# Altium PCB 控制器终.PcbDoc (part 2 of 2)
Units mil, origin at the board's own origin, x right, y up, seen from the top; angles counter-clockwise.
Board outline 4045 x 3522 mil, 2 copper layers (Top Layer, Bottom Layer); 118 components, 129 nets, 483 pads, 116 vias.
Unrouted connection lines stored in the file: 1.
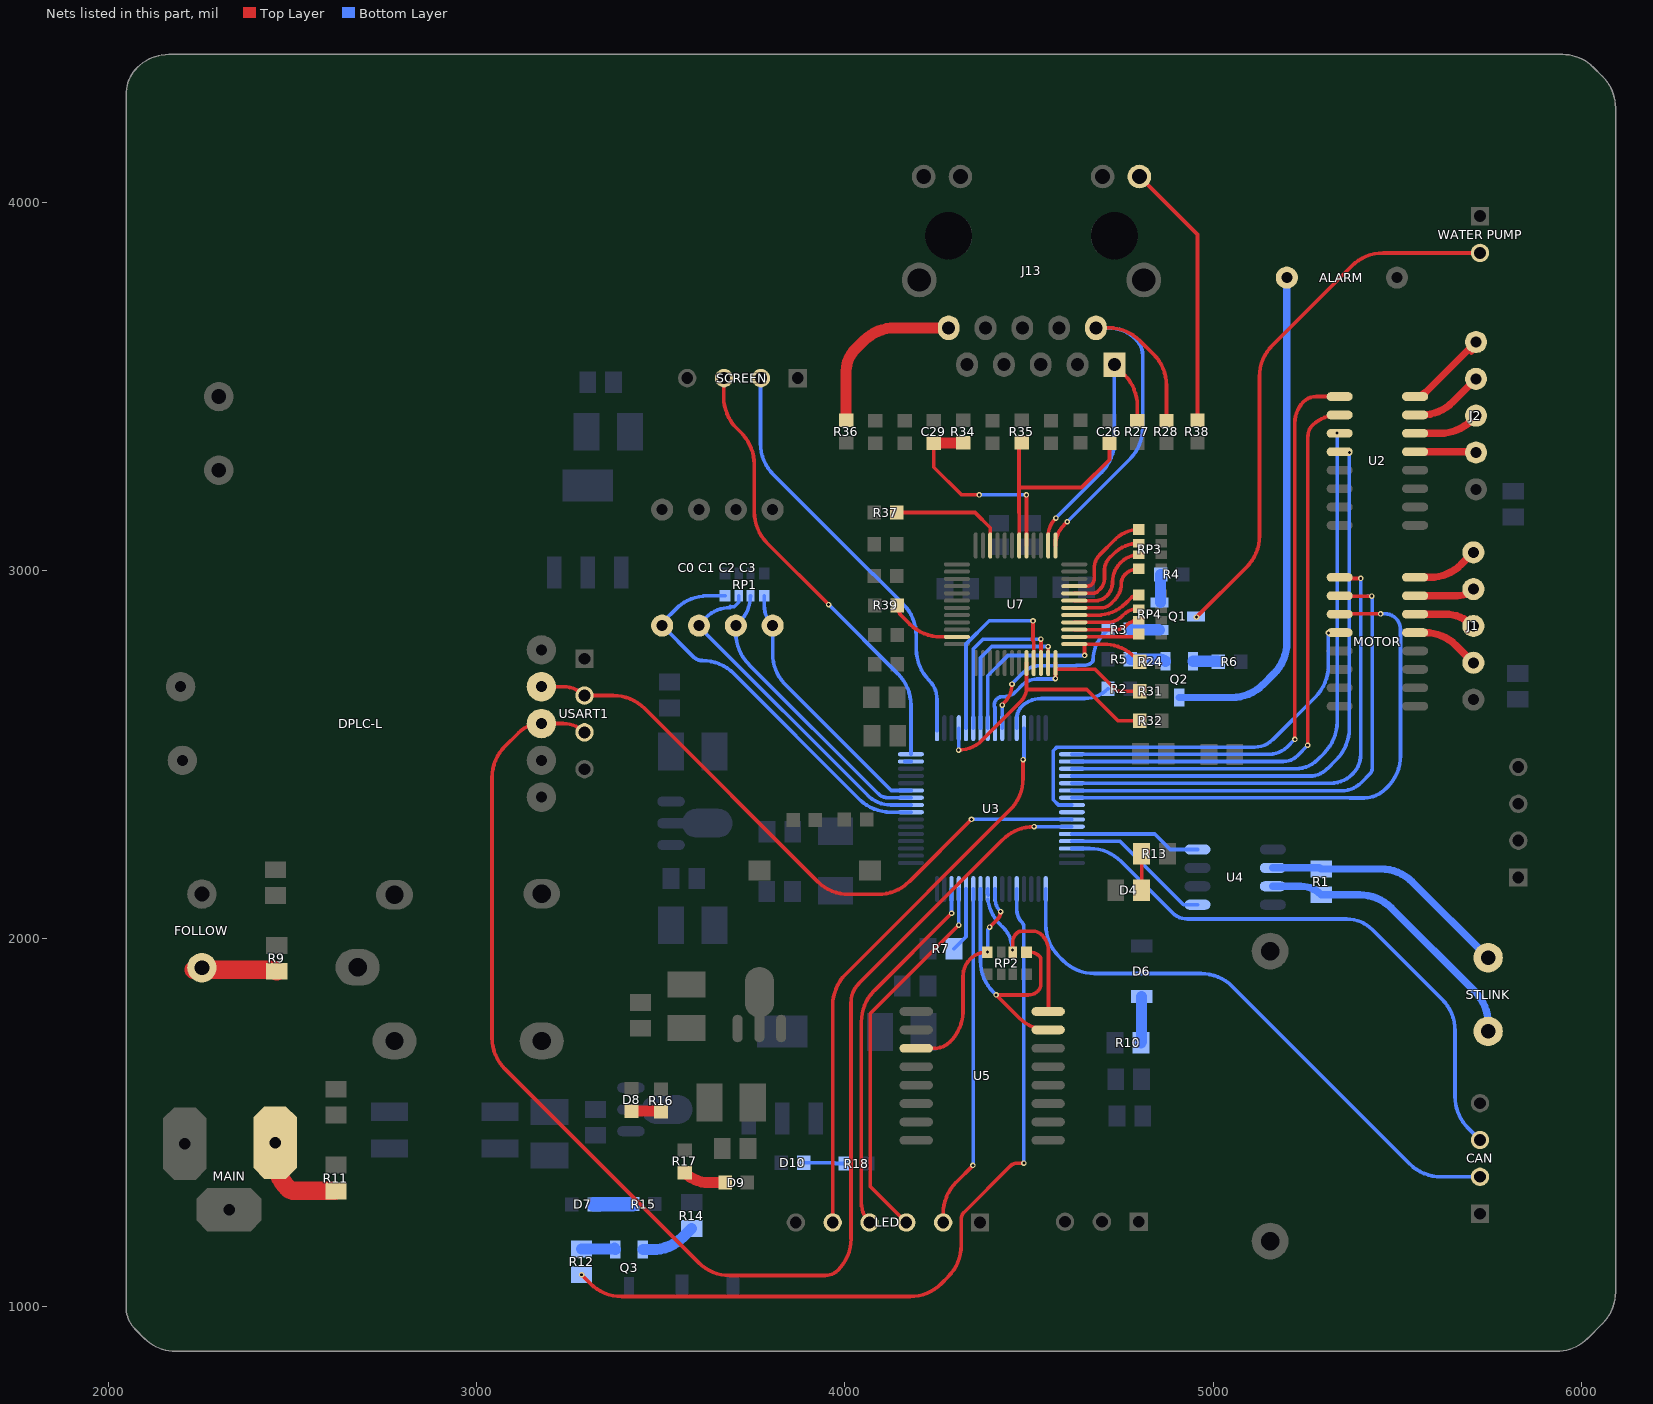
[diagram p2: the nets of this part, all layers, seen from the top]

## Via types
v1: diameter 15, hole 8, Top Layer to Bottom Layer, 112 vias
v2: diameter 196.85, hole 157.48, Top Layer to Bottom Layer, 3 vias
v3: diameter 196.85/196.85 (per signal layer), hole 157.48, Top Layer to Bottom Layer, 1 vias

## Nets (pads, with @x,y where several pads share a name; then routed paths per layer and width w, separated by ;. In a path a pad name is that pad's centre, name@x,y a point inside that pad or via, vN(x,y) a via of type N, cw(c..) or ccw(c..) an arc to the next point about the centre after c; other vN are vias at no path point) (continued)
NetD4_K: D4.K R13.2@4805.96,2230.38 | length 115.7
  Top Layer w10: R13.2@4805.96,2214.08 R13.2@4805.96,2230.38 cw(c4805.77,2230.19) 4806.04,2230.19 D4.K@4806.04,2131
NetD5_K: 
NetD6_1: D6.1 R10.2 | length 126.1
  Bottom Layer w30: R10.2@4804.04,1716.98 ccw(c4799.31,1721.71) 4806,1721.71 D6.1@4806,1842.61
NetD7_K: D7.K R15.2 | length 105
  Bottom Layer w40: D7.K@3319,1278.21 3421.34,1278.21 ccw(c3421.34,1281.63) R15.2@3423.75,1279.21
NetD8_K: D8.K R16.2 | length 80.6
  Top Layer w30: D8.K@3420.91,1531.69 3496.76,1531.69 cw(c3496.76,1525.69) R16.2@3501,1529.93
NetD9_K: D9.K R17.2 | length 117
  Top Layer w30: R17.2@3565,1364.68 ccw(c3631.27,1430.95) 3631.27,1337.23 D9.K@3674.69,1337.23
NetD10_K: D10.K R18.2 | length 114.2
  Bottom Layer w10: D10.K@3888.31,1391 3972.64,1391 3974.64,1389 R18.2@4001.68,1389
NetD11_1: 
NetD11_2: 
NetJ1_1: J1.1 MOTOR.16 | length 181.4
  Top Layer w20: MOTOR.16@5548.56,2981 5588.99,2981 ccw(c5588.99,3101.71) 5674.35,3016.36 J1.1@5707,3049.01
NetJ1_2: J1.2 MOTOR.15 | length 163.3
  Top Layer w20: MOTOR.15@5548.56,2931 5663.52,2931 ccw(c5663.52,2992.49) J1.2@5707,2949.01
NetJ1_3: J1.3 MOTOR.14 | length 167
  Top Layer w20: MOTOR.14@5548.56,2881 5629.77,2881 cw(c5629.77,2771.78) J1.3@5707,2849.01
NetJ1_4: J1.4 MOTOR.13 | length 187.2
  Top Layer w20: MOTOR.13@5548.56,2831 5575.01,2831 cw(c5575.01,2710.29) 5660.37,2795.64 J1.4@5707,2749.01
NetJ2_1: J2.1 U2.16 | length 259.1
  Top Layer w10: 5701.26,3589.26 ccw(c5670.5,3620.02) J2.1@5714,3620.02
  Top Layer w20: U2.16@5548.56,3472 ccw(c5548.56,3514.06) 5578.3,3484.32 J2.1@5714,3620.02
NetJ2_2: J2.2 U2.15 | length 200.8
  Top Layer w20: U2.15@5548.56,3422 5565.98,3422 ccw(c5565.98,3542.71) 5651.34,3457.36 J2.2@5714,3520.02
NetJ2_3: J2.3 U2.14 | length 180.1
  Top Layer w20: U2.14@5548.56,3372 5615.98,3372 ccw(c5615.98,3492.71) 5701.34,3407.36 J2.3@5714,3420.02
NetJ2_4: J2.4 U2.13 | length 166
  Top Layer w20: U2.13@5548.56,3322 5709.22,3322 cw(c5709.22,3315.24) J2.4@5714,3320.02
NetJ4_2: "WATER PUMP.2" Q1.3 | length 1475.7
  Top Layer w10: v1(4955,2873) 5090.64,3008.64 ccw(c5005.29,3094) 5126,3094 5126,3526 cw(c5246.71,3526) 5161.36,3611.36 5376.64,3826.64 cw(c5462,3741.29) 5462,3862 5725,3862
NetJ6_1: R1.2 STLINK.1 U4.6 | length 680.1
  Bottom Layer w20: U4.6@5162.36,2192 5286.85,2192 cw(c5286.85,2181.89) R1.2@5294,2189.04 5455.96,2189.04 cw(c5455.96,2068.33) 5541.32,2153.68 STLINK.1@5747,1948
NetJ6_2: R1.1 STLINK.2 U4.7 | length 776.2
  Bottom Layer w20: U4.7@5162.36,2142 5238.38,2142 cw(c5238.38,2063.34) R1.1@5294,2118.96 5398.04,2118.96 cw(c5398.04,1998.25) 5483.4,2083.6 5711.64,1855.36 cw(c5626.29,1770) 5747,1770 STLINK.2@5747,1748
NetJ10_1: MAIN.1 R11.1 | length 265.4
  Top Layer w30: R11.1@2614,1314.78 R11.1@2618,1314.78
  Top Layer w50: MAIN.1@2452.72,1446 2452.72,1407.28 ccw(c2573.43,1407.28) 2488.08,1321.92 ccw(c2505.31,1339.16) 2505.31,1314.78 R11.1@2614,1314.78
NetJ13_10: J13.10 R36.2 | length 472.2
  Top Layer w30: R36.2@4003.63,3407.32 4003.63,3541.17 cw(c4086.83,3541.17) 4028,3600 4051.14,3623.14 cw(c4136.5,3537.79) 4136.5,3658.5 J13.10@4282,3658.5
NetJ13_11: J13.11 R38.2 | length 727.5
  Top Layer w10: J13.11@4800,4069.5 4957.63,3911.87 R38.2@4957.63,3407.32
NetP1_1: FOLLOW.1 R9.1 | length 226
  Top Layer w50: FOLLOW.1@2232,1915 2447.87,1915 cw(c2447.87,1902.09) R9.1@2457,1911.22
NetQ1_1: Q1.1 R3.2 | length 79.8
  Bottom Layer w30: R3.2@4775.32,2838.71 4852.11,2838.71 cw(c4852.11,2834.92) Q1.1@4854.79,2837.6
NetQ1_2: Q1.2 R4.1 | length 79.5
  Bottom Layer w10: Q1.2@4854.79,2912.4 Q1.2@4857.69,2912.4
  Bottom Layer w30: Q1.2@4857.69,2912.4 R4.1@4857.69,2989
NetQ2_1: Q2.1 R5.2 | length 96.7
  Bottom Layer w30: R5.2@4775.32,2758.62 4857.54,2758.62 cw(c4857.54,2740.16) Q2.1@4870.6,2753.21
NetQ2_2: Q2.2 R6.1 | length 69.5
  Bottom Layer w30: Q2.2@4945.4,2753.21 5011.62,2753.21 cw(c5011.62,2749.07) R6.1@5014.55,2752
NetQ2_3: ALARM.2 Q2.3 | length 1363.8
  Bottom Layer w20: Q2.3@4908,2654.79 5050.79,2654.79 ccw(c5050.79,2775.5) 5136.14,2690.14 5164.94,2718.94 ccw(c5079.59,2804.3) 5200.3,2804.3 ALARM.2@5200.3,3795
NetQ3_1: Q3.1 R12.2 | length 96.4
  Bottom Layer w30: R12.2@3285,1157.12 3371.98,1157.12 cw(c3371.98,1150.6) Q3.1@3376.6,1155.21 cw(c3380.46,1159.07) Q3.1@3375,1159.07
NetQ3_2: Q3.2 R14.1 | length 151.3
  Bottom Layer w30: Q3.2@3451.4,1155.21 3476.25,1155.21 ccw(c3476.25,1275.92) 3561.61,1190.57 R14.1@3584,1212.96
NetQ4_1: 
NetQ5_1: 
NetQ5_2: 
NetR2_1: R2.1 U3.28 | length 309.7
  Bottom Layer w10: U3.28@4466.9,2571.5 4466.9,2598.37 cw(c4511.63,2598.37) 4480,2630 cw(c4533.11,2576.89) 4533.11,2652 4650.63,2652 ccw(c4650.63,2742.59) R2.1@4714.69,2678.53
NetR8_2: R7.2 U3.60 | length 176.2
  Bottom Layer w10: R7.2@4296.04,1972 4329.1,2005.06 U3.60@4329.1,2134.5
NetR20_1: 
NetR21_1: 
NetR22_1: 
NetR23_1: 
NetR30_1: 
NetR37_2: R37.2 U7.10 | length 319.3
  Top Layer w10: R37.2@4140.95,3157 4353.73,3157 4394.73,3116 U7.10@4394.73,3067.45
NetR39_1: R39.1 U7.23 | length 200.5
  Top Layer w10: R39.1@4141.95,2904.91 ccw(c4182.03,2904.91) 4153.69,2876.57 4175.48,2854.77 ccw(c4260.84,2940.13) 4260.84,2819.42 U7.23@4304.18,2819.42
NetRP1_5: "C0 C1 C2 C3.4" RP1.5 U3.11 | length 713.1
  Bottom Layer w10: RP1.5@3781.15,2930.68 3781.15,2905.16 ccw(c3859.16,2905.16) 3804,2850 3804,2774 ccw(c3924.71,2774) 3835.76,2692.39 ccw(c3924.71,2774) 3839.36,2688.64 4090.43,2437.57 ; 4092.79,2435.37 4125.95,2402.21 U3.11@4179.5,2402.21
NetRP1_6: "C0 C1 C2 C3.3" RP1.6 U3.10 | length 796.2
  Bottom Layer w10: RP1.6@3743.75,2930.68 cw(c3644.92,2930.68) 3714.8,2860.8 3704,2850 3704,2830 ccw(c3824.71,2830) 3739.36,2744.64 4090.49,2393.51 ccw(c4117,2420.02) 4117,2382.53 U3.10@4179.5,2382.53
NetRP1_7: "C0 C1 C2 C3.2" RP1.7 U3.9 | length 926.3
  Bottom Layer w10: 3689.21,2901.94 ccw(c3689.73,2901.42) 3689,2901.42 3689,2901 ; RP1.7@3712.25,2930.68 3712.25,2913.25 3700,2901 3689,2901 ; U3.9@4179.5,2362.84 4125.15,2362.84 cw(c4125.15,2452.15) 4073.96,2378.97 cw(c4125.15,2452.15) 4062,2389 3606.12,2844.88 cw(c3611.24,2850) 3604,2850 cw(c3611.24,2850) 3606.12,2855.12 3622.42,2871.42 cw(c3689,2804.85) 3637.98,2883.98 cw(c3689,2804.85) 3689,2899 3689,2901
NetRP1_8: "C0 C1 C2 C3.1" RP1.8 U3.8 | length 1076.5
  Bottom Layer w10: RP1.8@3674.85,2930.68 3626.68,2930.68 ccw(c3626.68,2809.97) 3571.15,2917.15 ccw(c3626.68,2809.97) 3541.33,2895.33 3509.66,2863.66 ccw(c3523.31,2850) 3504,2850 3589.1,2764.9 ccw(c3613,2788.8) 3613,2755 cw(c3613,2634.29) 3698.36,2719.64 4039.49,2378.51 ccw(c4124.84,2463.87) 4049.21,2369.79 ccw(c4124.84,2463.87) 4124.84,2343.16 U3.8@4179.5,2343.16
NetRP3_4: RP3.4 U7.42 | length 235.2
  Top Layer w10: U7.42@4623.08,2898.16 4695.93,2898.16 ccw(c4695.93,2935.02) 4722,2908.96 4731.88,2918.83 ccw(c4685.71,2965) 4751,2965 cw(c4784.8,2965) 4760.9,2988.9 4760.98,2988.98 cw(c4798.31,2951.65) RP3.4@4798.31,3004.45
NetRP4_5: RP4.5 U7.41 | length 192
  Top Layer w10: U7.41@4623.08,2878.47 4685.88,2878.47 ccw(c4685.88,2986.12) 4726.38,2886.38 ccw(c4685.88,2986.12) 4762,2910 4776.29,2924.29 cw(c4798.31,2902.26) RP4.5@4798.31,2933.41
NetRP4_6: RP4.6 U7.40 | length 185.5
  Top Layer w10: U7.40@4623.08,2858.79 4711.45,2858.79 ccw(c4711.45,2917.55) 4753,2876 4755.12,2878.12 cw(c4798.31,2834.92) 4775.63,2891.64 cw(c4798.31,2834.92) RP4.6@4798.31,2896.01
NetRP4_7: RP4.7 U7.39 | length 182.1
  Top Layer w10: U7.39@4623.08,2839.1 4737.69,2839.1 ccw(c4737.69,2876.31) 4764,2850 4764.51,2850.51 cw(c4798.31,2816.71) 4776.97,2859.48 cw(c4798.31,2816.71) RP4.7@4798.31,2864.51
NetRP4_8: RP4.8 U7.38 | length 177.3
  Top Layer w10: U7.38@4623.08,2819.42 4779.73,2819.42 ccw(c4779.73,2845.69) RP4.8@4798.31,2827.11
PA1: U3.15 | length 16.4
  Bottom Layer w10: U3.15@4163.05,2480.95 U3.15@4179.5,2480.95
PA2: SCREEN.3 U3.16 | length 1213.2
  Top Layer w10: SCREEN.3@3671,3524 3671,3471 ccw(c3791.71,3471) 3706.36,3385.64 3718.64,3373.36 cw(c3633.29,3288) 3730.67,3359.33 cw(c3633.29,3288) 3754,3288 3754,3159 ccw(c3874.71,3159) 3789.36,3073.64 v1(3956,2907)
  Bottom Layer w10: v1(3956,2907) 4144.14,2718.86 cw(c4058.79,2633.5) 4179.5,2633.5 U3.16@4179.5,2500.64
PA3: SCREEN.2 U3.17 | length 1140.2
  Bottom Layer w10: SCREEN.2@3771,3524 3771,3345 ccw(c3891.71,3345) 3806.36,3259.64 4076.5,2989.5 ; 4077,2990 4158.64,2908.36 cw(c4073.29,2823) 4194,2823 4194,2786 ccw(c4314.71,2786) 4229.36,2700.64 cw(c4178.64,2649.93) 4250.36,2649.93 U3.17@4250.36,2571.5 U3.17@4250.36,2564
PA8: U3.41
PA9: DPLC-L.2 U3.42 USART1.2 | length 1739.7
  Top Layer w10: DPLC-L.2@3176,2684 3235.06,2684 cw(c3235.06,2602.06) USART1.2@3293,2660 3371,2660 cw(c3371,2539.29) 3456.36,2624.64 3925.64,2155.36 ccw(c4011,2240.71) 4011,2120 4090,2120 ccw(c4090,2240.71) 4145.53,2133.53 ccw(c4090,2240.71) 4175.36,2155.36 v1(4344,2324)
  Bottom Layer w10: v1(4344,2324) 4615.98,2324 U3.42@4616.5,2323.47
PA10: DPLC-L.3 U3.43 USART1.3 | length 3817.7
  Top Layer w10: USART1.3@3293,2560 ccw(c3235.06,2502.06) 3235.06,2584 DPLC-L.3@3176,2584 ccw(c3176,2494.67) 3112.84,2557.84 3077.36,2522.36 ccw(c3162.71,2437) 3042,2437 3042,1731 ccw(c3162.71,1731) 3077.36,1645.64 3602.64,1120.36 ccw(c3688,1205.71) 3688,1085 3946.29,1085 ccw(c3946.29,1135) 3981.64,1099.64 ccw(c3896.29,1185) 4017,1185 4017,1827.3 cw(c4088.7,1827.3) 4019.17,1844.82 cw(c4088.7,1827.3) 4038,1878 4428.43,2268.43 cw(c4513.79,2183.08) 4469.86,2295.51 cw(c4513.79,2183.08) 4513.79,2303.79 v1(4514,2303.79)
  Bottom Layer w10: v1(4514,2303.79) U3.43@4616.5,2303.79
PA11: U3.44 U4.4 | length 358.6
  Bottom Layer w10: U3.44@4616.5,2284.1 4841.9,2284.1 4884,2242 U4.4@4957.64,2242
PA12: U3.45 U4.1 | length 412.6
  Bottom Layer w10: U3.45@4616.5,2264.42 4747.58,2264.42 4920,2092 U4.1@4957.64,2092
PB7: LED.2 U3.59 | length 934.1
  Top Layer w10: LED.2@4267,1229 4267,1253 cw(c4387.71,1253) 4302.36,1338.36 v1(4348,1384)
  Bottom Layer w10: v1(4348,1384) ccw(c4346.1,1385.9) 4348.79,1385.9 U3.59@4348.79,2134.5
PB8: LED.3 U3.61 | length 1045.7
  Top Layer w10: LED.3@4167,1229 4069,1327 4069,1796.22 v1(4309.42,2036.64)
  Bottom Layer w10: v1(4309.42,2036.64) U3.61@4309.42,2134.5
PB9: LED.4 U3.62 | length 1007.6
  Top Layer w10: LED.4@4067,1229 cw(c4120.11,1282.11) 4045,1282.11 4045,1774 cw(c4165.71,1774) 4077.96,1856.89 cw(c4165.71,1774) 4080.36,1859.36 v1(4289.73,2068.73)
  Bottom Layer w10: v1(4289.73,2068.73) U3.62@4289.73,2134.5
PB10: LED.5 U3.29 | length 1547
  Top Layer w10: LED.5@3967,1229 3967,1818 cw(c4087.71,1818) 4002.36,1903.36 4448.64,2349.64 ccw(c4363.29,2435) 4484,2435 v1(4484,2486)
  Bottom Layer w10: v1(4484,2486) ccw(c4477.77,2492.23) 4486.58,2492.23 U3.29@4486.58,2571.5
PB12: U2.1 U3.33 | length 1644.3
  Top Layer w10: v1(5222,2541) 5222,3400.06 cw(c5303.94,3400.06) 5234,3442.75 cw(c5303.94,3400.06) 5246,3458 cw(c5279.8,3424.2) 5271.91,3471.35 cw(c5279.8,3424.2) 5279.8,3472 U2.1@5343.83,3472
  Bottom Layer w10: U3.33@4616.5,2500.64 5153.67,2500.64 ccw(c5153.67,2568.16) 5201.41,2520.41 v1(5222,2541)
PB13: U2.2 U3.34 | length 1610.2
  Top Layer w10: v1(5257,2525) 5257,3366.44 ; 5258,3366.44 cw(c5295.56,3366.44) 5269,3393 cw(c5339.01,3322.99) 5277.85,3400.85 cw(c5339.01,3322.99) 5339.01,3422 U2.2@5343.83,3422
  Bottom Layer w10: U3.34@4616.5,2480.95 5191,2480.95 ccw(c5191,2536.36) 5230.18,2497.18 v1(5257,2525)
PB14: U2.3 U3.35 | length 1578.1
  Bottom Layer w10: U3.35@4616.5,2461.27 5224.29,2461.27 ccw(c5224.29,2545.71) 5284,2486 5301.64,2503.64 ccw(c5216.29,2589) 5337,2589 5337,3370.59 ccw(c5333.59,3370.59) v1(5336,3373)
PB15: U2.4 U3.36 | length 1586.4
  Bottom Layer w10: U3.36@4616.5,2441.58 5270.01,2441.58 ; 5261,2441 ccw(c5261,2511.01) 5270.01,2441.58 ; v1(5370,3320) 5370,2571 cw(c5249.29,2571) 5334.64,2485.64 5310.51,2461.51 cw(c5261,2511.01) 5270.01,2441.58
PC6: MOTOR.1 U3.37 | length 1364
  Top Layer w10: MOTOR.1@5343.83,2981 ccw(c5351.07,2988.24) 5351.07,2978 v1(5401,2978)
  Bottom Layer w10: U3.37@4616.5,2421.9 5319,2421.9 ; 5319,2422 ccw(c5319,2506.5) 5378.75,2446.75 ccw(c5325.03,2500.47) 5401,2500.47 v1(5401,2978)
PC7: MOTOR.2 U3.38 | length 1408.2
  Top Layer w10: MOTOR.2@5343.83,2931 cw(c5346.25,2928.59) 5346.25,2932 5348.25,2930 v1(5431,2930)
  Bottom Layer w10: U3.38@4616.5,2402.21 4617.32,2401.4 5349.39,2401.4 ccw(c5349.39,2476.26) 5402.32,2423.32 5426.34,2447.34 ccw(c5412.66,2461.01) 5432,2461.01 v1@5432,2927.76 ; 5419,2930 v1(5431,2930)
PC8: MOTOR.3 U3.39 | length 1492.8
  Top Layer w10: MOTOR.3@5343.83,2881 cw(c5346.25,2878.59) 5346.25,2882 v1(5455,2882)
  Bottom Layer w10: U3.39@4616.5,2382.53 5372,2382.53 ; 5372,2382 5410.06,2382 ccw(c5410.06,2463.94) 5419.35,2382.53 ccw(c5410.06,2463.94) 5442,2388.48 ccw(c5410.06,2463.94) 5468,2406 5473.64,2411.64 ccw(c5388.29,2497) 5509,2497 5509,2838.62 ccw(c5464.62,2838.62) 5496,2870 ccw(c5467.03,2841.03) 5467.03,2882 v1(5455,2882)
PC9: MOTOR.4 U3.40 | length 1142.2
  Bottom Layer w10: U3.40@4616.5,2362.84 4580,2362.84 4566,2376.84 4566,2510 4576,2520 5113,2520 ccw(c5113,2590.01) 5162.51,2540.51 5277.64,2655.64 ccw(c5192.29,2741) 5313,2741 v1(5313,2830)
PC12: R12.1 U3.53 | length 2184.5
  Top Layer w10: v1(3285,1087.04) 3308.69,1063.36 ccw(c3394.04,1148.71) 3394.04,1028 4177,1028 ccw(c4177,1148.71) 4262.36,1063.36 4280.64,1081.64 ccw(c4195.29,1167) 4316,1167 4316,1237.69 cw(c4343.31,1237.69) 4323.99,1256.99 4449.89,1382.89 cw(c4467.06,1365.72) 4467.06,1390 v1(4486,1390)
  Bottom Layer w10: U3.53@4466.9,2134.5 4466.9,2078.05 ccw(c4515.05,2078.05) 4481,2044 cw(c4468.93,2031.93) 4486,2031.93 v1(4486,1390)
RXN: C29.1 R34.2 U7.5 | length 566.1
  Top Layer w10: C29.1@4241.63,3345.69 4241.63,3280 4316.63,3205 v1(4365,3205) ; U7.5@4493.16,3067.45 v1(4493.16,3205)
  Top Layer w30: C29.1@4241.63,3345.69 4319.22,3345.69 ccw(c4319.22,3349.09) R34.2@4321.63,3346.68
  Bottom Layer w10: v1(4365,3205) v1(4493.16,3205)
RXP: C26.1 R35.2 U7.6 | length 609.1
  Top Layer w10: U7.6@4473.47,3067.45 4473.47,3156 4473,3156.47 4473,3225 ; R35.2@4480.63,3346.68 4473,3346.68 4473,3225 ; C26.1@4718.63,3345.69 4718.63,3300.63 4643,3225 4473,3225
SCL: RP2.6 U3.57 U5.16 | length 506.1
  Top Layer w10: RP2.6@4455.75,1978.24 4455.75,1989.25 cw(c4490.75,1989.25) 4466,2014 cw(c4480.49,1999.51) 4480.49,2020 4510.86,2020 cw(c4510.86,1985.86) 4535,2010 cw(c4491.54,1966.54) 4553,1966.54 U5.16@4553,1802
  Bottom Layer w10: U3.57@4387,2123 U3.57@4387,2131 ; U3.57@4388.16,2106.32 ccw(c4507.71,2123) 4388.33,2105.13 ccw(c4507.71,2123) 4422.36,2037.64 4429.4,2030.6 cw(c4368.06,1969.26) v1(4454.81,1969.26) ; U3.57@4388.16,2134.5 4388.16,2120.84 4389.33,2119.67 U3.57@4389.33,2117.67
SDA: RP2.5 U3.58 U5.15 | length 728.1
  Top Layer w10: RP2.5@4493.15,1963.32 4501.68,1963.32 cw(c4501.68,1924.68) 4529,1952 cw(c4521.76,1944.76) 4532,1944.76 4532,1874.9 cw(c4508.1,1874.9) 4525,1858 cw(c4498.44,1884.56) 4498.44,1847 v1(4411,1847) 4473.38,1784.62 ccw(c4552.13,1863.38) U5.15@4552.13,1752
  Bottom Layer w10: U3.58@4368.47,2134.5 4368.47,1939.53 ccw(c4489.18,1939.53) 4403.83,1854.17 v1(4411,1847)
SQW: RP2.8 U3.56 U5.3 | length 575.8
  Top Layer w10: U5.3@4193.87,1702 4240,1702 4243.11,1702 ccw(c4243.11,1762.1) 4285.6,1719.6 ccw(c4200.25,1804.96) 4318.44,1780.44 ccw(c4200.25,1804.96) 4320.96,1804.96 4320.96,1897.74 cw(c4386.66,1897.74) 4326.97,1925.2 cw(c4386.66,1897.74) 4340.2,1944.2 cw(c4388,1896.4) 4360.85,1958.31 cw(c4388,1896.4) v1(4388,1964) ; v1(4393,2031) 4414.51,2052.51 ccw(c4394.03,2073) v1(4423,2073)
  Bottom Layer w10: v1(4388,1964) 4388,2018.93 cw(c4405.07,2018.93) v1(4393,2031) ; U3.56@4407.84,2134.5 4407.84,2109.59 ccw(c4459.59,2109.59) v1(4423,2073)
SWCLK: CAN.2 U3.49 | length 1568.5
  Bottom Layer w10: U3.49@4545.64,2134.5 4545.64,2037.36 ccw(c4666.35,2037.36) 4580.99,1952.01 4592.64,1940.36 ccw(c4678,2025.71) 4678,1905 4967,1905 cw(c4967,1784.29) 5052.36,1869.64 5533.65,1388.35 ccw(c5619.01,1473.7) 5619.01,1352.99 CAN.2@5725,1352.99
SWDIO: CAN.3 U3.46 | length 1577.6
  Bottom Layer w10: U3.46@4616.5,2244.73 4665,2244.73 cw(c4665,2124.02) 4750.36,2209.38 4890.28,2069.45 ccw(c4930,2109.17) 4890.32,2069.42 ccw(c4930,2109.17) 4930,2053 5362.99,2053 cw(c5362.99,1953.99) 5382.79,2051 cw(c5362.99,1953.99) 5433,2024 5621.64,1835.36 cw(c5536.29,1750) 5657,1750 5657,1570.99 ccw(c5777.71,1570.99) 5673,1510.93 ccw(c5777.71,1570.99) 5692.36,1485.63 CAN.3@5725,1452.99
TXN: J13.2 R28.1 U7.1 | length 1159.4
  Top Layer w10: U7.1@4571.9,3084.81 U7.1@4571.9,3067.45 cw(c4650.25,3067.45) 4594.85,3122.85 v1(4604,3132) ; J13.2@4682,3658.5 4716.5,3658.5 cw(c4716.5,3537.79) 4801.86,3623.14 4838.01,3586.99 cw(c4752.66,3501.63) 4873.37,3501.63 R28.1@4873.37,3406.31
  Bottom Layer w10: v1(4604,3132) 4773.64,3301.64 ccw(c4688.29,3387) 4809,3387 4809,3583.54 ccw(c4747.54,3583.54) 4791,3627 ccw(c4714.95,3550.95) 4714.95,3658.5 J13.2@4682,3658.5
TXP: J13.1 R27.1 U7.2 | length 730.1
  Top Layer w10: U7.2@4552.21,3067.45 4552.21,3091.82 cw(c4623.18,3091.82) 4554.11,3108.11 cw(c4623.18,3091.82) v1(4573,3142) ; J13.1@4732,3558.5 4759.01,3531.49 cw(c4673.66,3446.13) 4794.37,3446.13 R27.1@4794.37,3406.31
  Bottom Layer w10: v1(4573,3142) 4696.64,3265.64 ccw(c4611.29,3351) 4732,3351 J13.1@4732,3558.5
"W  PMODE2": RP3.3 U7.43 | length 247.4
  Top Layer w10: U7.43@4623.08,2917.84 4681.65,2917.84 ccw(c4681.65,2959.35) 4711,2930 ccw(c4672.37,2968.63) 4725.7,2956.8 ccw(c4672.37,2968.63) 4727,2968.63 cw(c4800.33,2968.63) 4737.6,3006.6 cw(c4800.33,2968.63) 4748.48,3020.48 4749.72,3021.72 cw(c4798.31,2973.12) 4763.2,3032.2 cw(c4798.31,2973.12) RP3.3@4798.31,3041.85
"W INTN": R31.1 U3.25 U7.36 | length 571.2
  Top Layer w10: U7.36@4571.9,2731 U7.36@4571.9,2748.55 cw(c4571.66,2748.31) 4572,2748.31 U7.36@4572,2731 ; v1(4572,2706) U7.36@4572,2731 ; R31.1@4800.31,2671.46 4739.54,2671.46 4680,2731 U7.36@4572,2731
  Bottom Layer w10: U3.25@4407.84,2571.5 4407.84,2626.18 ccw(c4402.78,2626.18) 4406.37,2629.76 4406.17,2629.96 4406.17,2635.92 cw(c4426.08,2635.92) 4412,2650 cw(c4428.9,2633.1) 4428.9,2657 4431.53,2657 ccw(c4431.53,2703.09) 4464.13,2670.5 4482.1,2688.47 ; 4482.12,2688.49 cw(c4522,2648.57) 4522,2705 4569.59,2705 ccw(c4569.59,2708.41) v1(4572,2706)
"W MISO": U3.22 U7.34 | length 474.1
  Top Layer w10: U7.34@4532.53,2748.55 v1(4532.53,2813)
  Bottom Layer w10: U3.22@4348.79,2571.5 4348.79,2786.42 4375.37,2813 v1(4532.53,2813)
"W MOSI": U3.23 U7.35 | length 431.6
  Top Layer w10: v1(4552,2793) 4552.21,2792.79 U7.35@4552.21,2748.55
  Bottom Layer w10: U3.23@4368.47,2571.5 4368.47,2762.33 4399.15,2793 v1(4552,2793)
"W PMODE0": RP3.1 U7.45 | length 265.6
  Top Layer w10: U7.45@4623.08,2957.21 4659.44,2957.21 ccw(c4659.44,2973.56) 4662.77,2957.55 ccw(c4659.44,2973.56) 4671,2962 ccw(c4656.51,2976.49) 4677,2976.49 4677,3004.37 cw(c4731.63,3004.37) 4686.7,3035.44 cw(c4731.63,3004.37) 4693,3043 4734.18,3084.18 cw(c4798.31,3020.05) 4743.75,3092.5 cw(c4798.31,3020.05) RP3.1@4798.31,3110.75
"W PMODE1": RP3.2 U7.44 | length 257.4
  Top Layer w10: U7.44@4623.08,2937.53 4673.79,2937.53 ccw(c4673.79,2956.21) 4683.68,2940.36 ccw(c4673.79,2956.21) 4687,2943 4693.69,2949.69 ccw(c4666.37,2977) 4697.65,2954.33 ccw(c4666.37,2977) 4705,2977 4705,3000.2 cw(c4752.8,3000.2) 4705.08,3002.97 cw(c4752.8,3000.2) 4719,3034 4730.08,3045.08 cw(c4798.31,2976.85) RP3.2@4798.31,3073.34
"W RST": R24.1 U3.24 U7.37 | length 651.7
  Top Layer w10: U7.37@4623.08,2799.73 U7.37@4653,2799.73 ; v1(4651,2769) 4651,2797.73 U7.37@4653,2799.73 ; R24.1@4800.31,2751.55 4787.49,2764.38 ccw(c4702.13,2679.02) 4731.43,2796.12 ccw(c4702.13,2679.02) 4702.13,2799.73 U7.37@4653,2799.73
  Bottom Layer w10: U3.24@4388.16,2571.5 4388.16,2714.01 4443.15,2769 v1(4651,2769)
"W SCLK": U3.21 U7.33 | length 552.5
  Top Layer w10: v1(4511,2863) 4511,2817.83 cw(c4504.17,2817.83) 4509,2813 cw(c4499.72,2803.72) 4512.84,2803.72 U7.33@4512.84,2748.55
  Bottom Layer w10: U3.21@4329.1,2571.5 4329.1,2800 4392.1,2863 v1(4511,2863)
"W SCSN": R32.1 U3.20 U7.32 | length 733
  Top Layer w10: v1(4309,2512) ccw(c4309,2601.33) 4372.16,2538.16 4478.42,2644.42 ccw(c4442.85,2680) 4492.47,2671.68 ; U7.32@4493.16,2748.55 4493.16,2680 cw(c4442.85,2680) 4492.47,2671.68 ; R32.1@4800.31,2591.37 4741.63,2591.37 4656.81,2676.19 4496.97,2676.19 4492.47,2671.68
  Bottom Layer w10: v1(4309,2512) ccw(c4307.99,2513.01) 4309.42,2513.01 U3.20@4309.42,2571.5
WATER: R3.1 U3.26 | length 471.4
  Top Layer w10: v1(4427.53,2634) cw(c4431.22,2634) 4428.6,2636.6 4433.49,2641.49 ccw(c4383.99,2691) 4450.17,2668.17 ccw(c4383.99,2691) v1(4454,2691)
  Bottom Layer w10: U3.26@4427.53,2571.5 v1(4427.53,2634) ; v1(4454,2691) cw(c4456.41,2691) 4454.71,2692.71 4485.32,2723.32 cw(c4528,2680.64) 4528,2741 4627.59,2741 ccw(c4627.59,2744.41) 4630,2742 4650.27,2742 ; R3.1@4714.69,2838.71 4703.84,2827.86 ccw(c4775.86,2755.83) 4674,2755.83 cw(c4667.17,2755.83) 4672,2751 cw(c4650.27,2772.73) 4654.26,2742.26 ; 4650.27,2742 ccw(c4650.27,2772.73) 4654.26,2742.26 ; 4650.27,2742 4654,2742 4654.26,2742.26
pads on no net: DPLC-L.5@3176,2384 J13. J13.7 J13.SH MOTOR.5 MOTOR.6 MOTOR.7 MOTOR.10 MOTOR.11 MOTOR.12 U2.5 U2.6 U2.7 U2.10 U2.11 U2.12 U3.2 U3.3 U3.4 U3.14 U3.50 U3.54 U3.55 U4.5 U5.4 U7.7 U7.8 U7.9 U7.11 U7.12 U7.13 U7.18 U7.24 U7.26 U7.46 U7.47 Y2.2 Y2.4
copper on no net:
  other v2: 2204.72,1062.99 5866.14,1062.99 2204.72,4212.6
  other v3: 5866.14,4212.6

## Polygon pours and split planes (outlines as drawn)
5V on Bottom Layer "AutoNaming" (solid, remove dead copper, pour order 44): 3492,2558 cw(c3492,2620.77) 3447.62,2576.38 3299,2725 ccw(c3274.86,2700.86) 3274.86,2735 3268,2735 ccw(c3246.27,2713.27) 3246.27,2744 3176,2744 cw(c3176,2753.66) 3169.17,2746.83 3134,2782 3134,3005.51 cw(c3154.49,3005.51) 3140,3020 cw(c3181.04,2978.96) 3181.04,3037 3201,3037 cw(c3201,3010.44) 3219.78,3029.22 3232,3017 3232,2930.42 ccw(c3332,2930.42) 3261.29,2859.71 3287,2834 3448.67,2672.33 ccw(c3505,2728.67) 3505,2649 3553,2649 cw(c3528.86,2624.86) 3563,2624.86 3563,2545 3563,2538.36 cw(c3477.64,2538.36) 3538,2478 3516.61,2499.39 cw(c3542.21,2525) 3506,2525 3506,2536.76 ccw(c3495.76,2536.76) 3503,2544
GND on Bottom Layer "AutoNaming" (solid, remove dead copper, pour order 26): 4793,1647 5134.58,1647 cw(c5134.58,1547) 5205.29,1617.71 5489,1334 5515.71,1307.29 ccw(c5586.42,1378) 5586.42,1278 5730,1278 ccw(c5734.83,1278) 5731.41,1274.59 5751,1255 5751,1113.49 cw(c5730.51,1113.49) 5745,1099 5706.29,1060.29 cw(c5635.58,1131) 5635.58,1031 4925,1031 4872.18,1031 cw(c4872.18,1123.18) 4807,1058 4802.29,1062.71 cw(c4873,1133.42) 4773,1133.42 4773,1226 4773,1467.27 cw(c4803.73,1467.27) 4782,1489 ccw(c4774.76,1496.24) 4785,1496.24 4785,1548 4785,1588.17 ccw(c4778.17,1588.17) 4783,1593 ccw(c4775.76,1600.24) 4786,1600.24 4786,1615
5V on Bottom Layer "AutoNaming" (solid, remove dead copper, pour order 24): 3676,1054 3676,1153.86 cw(c3710.14,1153.86) 3686,1178 cw(c3719.8,1144.2) 3719.8,1192 3748,1192 4291.65,1192 ccw(c4291.65,1233.38) 4320.91,1204.12 4344.32,1227.54 cw(c4372,1199.86) 4372,1239 4387.17,1239 ccw(c4387.17,1245.83) 4392,1241 4392,1062.9 4392,1053.56 cw(c4354.44,1053.56) 4381,1027 cw(c4327.89,1080.11) 4327.89,1005 3705,1005 3698.31,1005 cw(c3698.31,1032.31) 3679,1013 cw(c3691.07,1025.07) 3674,1025.07 3674,1053
3.3V on Bottom Layer "AutoNaming" (solid, remove dead copper, pour order 22): 3781,2975 3806.96,2975 ccw(c3806.96,3033.04) 3848,2992 ccw(c3809.37,3030.63) 3864,3030.63 3864,3077 ccw(c3827.79,3040.79) 3827.79,3092 3538,3092 3486.46,3092 cw(c3486.46,3153.46) 3443,3110 3374.54,3178.46 cw(c3383.07,3187) 3371,3187 cw(c3371,3211.14) 3353.93,3194.07 3305,3243 cw(c3300.17,3247.83) 3300.17,3241 3297,3241 3285.73,3241 ccw(c3285.73,3210.27) 3264,3232 3292.29,3203.71 ccw(c3294,3205.41) 3294,3203 3294,3123.49 ccw(c3314.49,3123.49) 3300,3109 ccw(c3316.9,3092.1) 3293,3092.1 3293,3052 cw(c3293,3017.62) 3317.31,3041.93 3317.36,3041.88 3317.36,3053.74 cw(c3350.26,3053.74) 3327,3077 cw(c3336.66,3067.34) 3336.66,3081 3356,3081 3371.58,3081 cw(c3371.58,2981) 3442.29,3051.71 3455,3039 3492.71,3001.29 ccw(c3563.42,3072) 3563.42,2972 3584,2972 3773.76,2972 ccw(c3773.76,2982.24) 3781,2975
GND on Bottom Layer "AutoNaming" (solid, remove dead copper, pour order 20): 4062,1370 4203.51,1370 ccw(c4203.51,1390.49) 4218,1376 ccw(c4167.3,1426.7) 4239,1426.7 4239,1466 4239,1476.69 ccw(c4211.69,1476.69) 4231,1496 ccw(c4223.76,1488.76) 4223.76,1499 4092,1499 4079.49,1499 cw(c4079.49,1519.49) 4065,1505 cw(c4079.49,1519.49) 4059,1519.49 4059,1536 cw(c4071.07,1536) 4062.54,1544.54 4085,1567 4167.71,1649.71 cw(c4238.42,1579) 4238.42,1679 4243,1679 4251.76,1679 ccw(c4251.76,1689.24) 4259,1682 ccw(c4256.59,1684.41) 4260,1684.41 4260,1922 4260,1993.93 cw(c4277.07,1993.93) 4265,2006 cw(c4255.97,2015.03) 4255.97,2002.26 4254.3,2002.26 ccw(c4254.3,1978.02) 4237.16,1995.16 4232,1990 4216.66,1974.66 cw(c4203,1988.31) 4203,1969 4203,1855.94 cw(c4121.06,1855.94) 4179,1798 ccw(c4180.74,1796.26) 4178.28,1796.26 4178.28,1712.31 4073.26,1607.29 cw(c4002.55,1678) 4002.55,1578 3938,1578 3917.9,1578 ccw(c3917.9,1554.1) 3901,1571 3901,1522 3901,1471.41 cw(c3897.59,1471.41) 3900,1469 ccw(c3919.31,1488.31) 3919.31,1461 3985,1461 3994.96,1461 cw(c3994.96,1402.96) 4036,1444 cw(c4016.38,1424.38) 4044.13,1424.38 4044.13,1408.17 4044.13,1373.11 ccw(c4047.11,1373.11) 4045,1371 4065,1371
5V on Bottom Layer "AutoNaming" (solid, remove dead copper, pour order 18): 3719,1469 3761.34,1469 ccw(c3761.34,1482.66) 3771,1473 ccw(c3763.76,1480.24) 3774,1480.24 3774,1571 3774,1601.76 ccw(c3763.76,1601.76) 3771,1609 ccw(c3763.76,1601.76) 3763.76,1612 3730,1612 3710.07,1612 ccw(c3710.07,1594.93) 3698,1607 ccw(c3700.41,1604.59) 3697,1604.59 3697,1492 ccw(c3713.9,1492) 3701.95,1480.05 3707,1475 3708.76,1473.24 ccw(c3719,1483.49) 3719,1469
3.3V on Bottom Layer "AutoNaming" (solid, remove dead copper, pour order 16): 3861.92,1702.97 4044.17,1702.97 cw(c4044.17,1679.17) 4061,1696 cw(c4075.49,1681.51) 4075.49,1702 4082,1702 4082,1706.73 cw(c4182,1706.73) 4111.29,1777.44 4131.26,1797.41 4131.26,1799.65 cw(c4171.35,1799.65) 4143,1828 4144.86,1829.86 cw(c4179,1795.72) 4179,1844 4179,2066.1 cw(c4202.9,2066.1) 4186,2083 cw(c4224.63,2044.37) 4224.63,2099 4250,2099 4250,2158.54 cw(c4268.44,2158.54) 4255.4,2171.58 4255.4,2185.2 cw(c4342.8,2185.2) 4281,2247 ccw(c4223.06,2304.94) 4305,2304.94 4305,2351 cw(c4319.49,2351) 4309.24,2361.24 4314,2366 cw(c4362.28,2317.72) 4362.28,2386 4493,2386 ccw(c4493,2431.87) 4525.44,2399.43 4539,2413 ccw(c4510.03,2441.97) 4551,2441.97 4551,2552 cw(c4533.67,2552) 4545.92,2539.75 4540.6,2534.42 cw(c4504.82,2534.42) 4530.12,2509.12 4499,2478 cw(c4441.06,2535.94) 4441.06,2454 4368,2454 4337.21,2454 cw(c4337.21,2505.21) 4301,2469 cw(c4320.31,2488.31) 4293,2488.31 4293,2512 ccw(c4293,2509.59) 4291.29,2511.29 4286,2506 4286,2484.14 cw(c4251.86,2484.14) 4276,2460 cw(c4243.8,2492.2) 4243.8,2446.66 4211.52,2446.66 4211.56,2446.66 4221.64,2436.58 4227.14,2436.58 cw(c4227.14,2373.14) 4272,2418 4272,2285.28 cw(c4203.72,2285.28) 4252,2237 4235.28,2220.28 cw(c4211.52,2244.05) 4211.52,2210.44 4199.48,2210.44 ccw(c4199.48,2205.52) 4196,2209 ccw(c4193.59,2206.59) 4193.59,2210 4148,2210 4140.41,2210 ccw(c4140.41,2206.59) 4138,2209 4095.29,2166.29 ccw(c4166,2095.58) 4066,2095.58 4066,2063 4066,2002.42 cw(c3966,2002.42) 4036.71,1931.71 4029,1924 4000.29,1895.29 cw(c3929.58,1966) 3929.58,1866 3798,1866 ccw(c3798,1827.37) 3770.69,1854.69 3762,1846 ccw(c3764.41,1843.59) 3761,1843.59 3761,1781 3761,1745.24 ccw(c3771.24,1745.24) 3764,1738 ccw(c3768.83,1742.83) 3768.83,1736 3776,1736
12V on Bottom Layer "AutoNaming" (solid, remove dead copper, pour order 14): 3382,1595 3382,1597.58 cw(c3482,1597.58) 3411.29,1668.29 3421,1678 3458.71,1715.71 ccw(c3388,1786.42) 3488,1786.42 3488,1912 3488,2247.51 cw(c3508.49,2247.51) 3494,2262 cw(c3506.07,2249.93) 3506.07,2267 3525,2267 3525,2265.41 ccw(c3528.41,2265.41) 3526,2263 3527.93,2261.07 cw(c3510.86,2244) 3535,2244 3535,2190.24 cw(c3524.76,2190.24) 3532,2183 cw(c3524.37,2175.37) 3535.16,2175.37 3535.16,2081.31 3535.16,2079.21 ccw(c3630.21,2079.21) 3563,2012 3563,1883.42 ccw(c3663,1883.42) 3592.29,1812.71 3608,1797 3644.71,1760.29 cw(c3574,1689.58) 3674,1689.58 3674,1530 3674,1418.42 ccw(c3774,1418.42) 3703.29,1347.71 3724,1327 ccw(c3786.77,1389.77) 3786.77,1301 4145,1301 4429.23,1301 4450.27,1301 cw(c4450.27,1270.27) 4472,1292 4552.71,1211.29 ccw(c4623.42,1282) 4623.42,1182 4636,1182 ccw(c4636,1239.94) 4676.97,1198.97 4683,1205 4689.17,1211.17 cw(c4696,1204.34) 4696,1214 cw(c4679.1,1214) 4691.05,1202.05 4674,1185 4671.46,1182.46 cw(c4610,1243.91) 4610,1157 4575.97,1157 cw(c4575.97,1197.97) 4547,1169 4464.09,1251.91 ccw(c4418,1205.82) 4418,1271 3780.42,1271 cw(c3780.42,1371) 3709.71,1300.29 3687,1323 3669.29,1340.71 cw(c3740,1411.42) 3640,1411.42 3640,1539 3640,1555.2 ccw(c3592.2,1555.2) 3626,1589 ccw(c3604.27,1567.27) 3604.27,1598 3488,1598 3478.14,1598 ccw(c3478.14,1563.86) 3454,1588 cw(c3446.76,1595.24) 3446.76,1585 3439,1585 3418,1585
24V on Bottom Layer "AutoNaming" (solid, remove dead copper, pour order 10): 3062,1456 3222.94,1456 ccw(c3222.94,1556) 3293.65,1485.29 3293.96,1485.6 ccw(c3317.13,1508.78) 3317.13,1476 3327,1476 3331.17,1476 ccw(c3331.17,1507.82) 3353.67,1485.32 3377.28,1485.32 ccw(c3377.28,1504.72) 3391,1491 ccw(c3405.49,1505.49) 3405.49,1485 3451,1485 ccw(c3458.24,1485) 3453.12,1479.88 3454,1479 3454,1437.49 3454,1394.28 cw(c3385.72,1394.28) 3434,1346 cw(c3383.3,1396.7) 3383.3,1325 3318,1325 3296.9,1325 ccw(c3296.9,1301.1) 3280,1318 ccw(c3289.66,1308.34) 3276,1308.34 3276,1292 cw(c3242.2,1292) 3266.1,1268.1 3257,1259 3032.83,1259 cw(c3032.83,1265.83) 3028,1261 3020.51,1268.49 cw(c3070.01,1318) 3000,1318 3000,1402.59 cw(c3003.41,1402.59) 3001,1405 3001,1442.17 cw(c3007.83,1442.17) 3003,1447 3006.34,1450.34 cw(c3020,1436.69) 3020,1456 3038.17,1456 cw(c3038.17,1449.17) 3043,1454
GND on Bottom Layer "AutoNaming" (solid, remove dead copper, pour order 8): 3060,1505 3120,1505 cw(c3120,1466.56) 3147.19,1493.74 3249.31,1493.74 3253.78,1498.21 cw(c3293.79,1458.21) 3293.79,1514.78 3350.11,1514.78 cw(c3350.11,1512.29) 3351.87,1514.05 cw(c3354.56,1511.37) 3354.56,1515.17 3435.9,1515.17 3470.51,1515.17 ccw(c3470.51,1538.49) 3487,1522 3495.26,1513.74 cw(c3478.19,1496.68) 3502.32,1496.68 3502.32,1375.75 cw(c3402.32,1375.75) 3473.04,1305.04 3466,1298 3495.29,1268.71 cw(c3493.59,1267) 3496,1267 3644.44,1267 cw(c3644.44,1229.44) 3671,1256 ccw(c3728.94,1313.94) 3728.94,1232 3787,1232 3747.42,1232 cw(c3747.42,1332) 3676.71,1261.29 3668,1270 3635.29,1302.71 cw(c3706,1373.42) 3606,1373.42 3606,1393 3606,1548.27 ccw(c3575.27,1548.27) 3597,1570 ccw(c3584.93,1557.93) 3584.93,1575 3544,1575 cw(c3476.4,1642.6) 3476.4,1547 3465,1547 3357.31,1547 ccw(c3357.31,1519.69) 3338,1539 3348.23,1549.23 ccw(c3339.44,1558.02) 3351.87,1558.02 3351.87,1617.45 cw(c3451.87,1617.45) 3381.16,1688.16 3397,1704 3408.71,1715.71 ccw(c3338,1786.42) 3438,1786.42 3438,2211 cw(c3522.5,2211) 3462.75,2270.75 3493,2301 cw(c3534.64,2259.36) 3534.64,2318.25 3582.21,2318.25 cw(c3582.21,2307.28) 3589.97,2315.03 3611,2294 cw(c3594.1,2277.1) 3618,2277.1 3618,2277 3618,2251.87 ccw(c3646.77,2251.87) 3626.43,2231.53 ccw(c3666.08,2191.87) 3610,2191.87 3610,2187 ccw(c3610,2172.51) 3599.76,2182.76 3598,2181 3598.04,2180.96 3598.04,2163 3598.04,2159.56 ccw(c3611.56,2159.56) 3602,2150 3624.34,2127.66 cw(c3610.69,2114) 3630,2114 3630,2105.08 ccw(c3688.04,2105.08) 3647,2064.04 ccw(c3661.49,2049.55) 3641,2049.55 3641,1985 3715.58,1985 ccw(c3715.58,2085) 3786.29,2014.29 3787,2015 ccw(c3729.06,2072.94) 3811,2072.94 3811,2130 ccw(c3801.88,2130) 3808.33,2136.45 3787.96,2156.82 ccw(c3768.55,2176.23) 3796,2176.23 3796,2220 3796,2269.59 ccw(c3792.59,2269.59) 3795,2272 3801.1,2278.1 ccw(c3777.2,2302) 3811,2302 3811,2500.58 ccw(c3711,2500.58) 3781.71,2571.29 3709,2644 3662.84,2690.16 ccw(c3592.12,2619.45) 3592.12,2719.45 3549.83,2719.45 3538.88,2719.45 cw(c3538.88,2728.14) 3532.73,2722 3440.29,2814.44 cw(c3511,2885.15) 3411,2885.15 3411,3027 ccw(c3411,3019.76) 3405.88,3024.88 3403,3022 3402.18,3021.18 ccw(c3472.66,2950.7) 3372.99,2950.7 3372.99,2848.43 ccw(c3472.99,2848.43) 3402.28,2777.72 3429,2751 3487.48,2692.52 cw(c3468.87,2673.92) 3495.18,2673.92 3534.97,2673.92 ccw(c3534.97,2681.03) 3540,2676 ccw(c3541.49,2677.49) 3541.49,2675.38 3553,2675.38 3557.45,2675.38 cw(c3557.45,2619.45) 3597,2659 cw(c3563.82,2625.82) 3610.74,2625.82 3610.74,2559.06 3610.74,2536.18 ccw(c3649.18,2536.18) 3622,2509 ccw(c3644.52,2486.48) 3612.67,2486.48 3612.67,2456.79 3612.67,2388.42 cw(c3562.58,2388.42) 3598,2353 3580.54,2335.54 cw(c3572,2344.07) 3572,2332 ccw(c3572,2314.91) 3559.91,2326.99 3551.41,2318.5 ccw(c3530.88,2297.96) 3530.88,2327 3504,2327 3450.42,2327 ccw(c3450.42,2227) 3379.71,2297.71 3370,2288 3355.29,2273.29 ccw(c3426,2202.58) 3326,2202.58 3326,1800 3326,1796.42 cw(c3226,1796.42) 3296.71,1725.71 3209.29,1638.29 cw(c3138.58,1709) 3138.58,1609 3115,1609 3042.63,1609 ccw(c3042.63,1554.37) 3004,1593 ccw(c3025.73,1571.27) 2995,1571.27 2995,1530 2995,1524.49 ccw(c3015.49,1524.49) 3001,1510 ccw(c3013.07,1522.07) 3013.07,1505 3055,1505
DC+ on Bottom Layer "AutoNaming" (solid, remove dead copper, pour order 6): 2770,1454 2813.3,1454 ccw(c2813.3,1525.7) 2864,1475 2868.71,1479.71 ccw(c2798,1550.42) 2898,1550.42 2898,1681 2898,2283.58 ccw(c2798,2283.58) 2868.71,2354.29 2769,2454 2612.29,2610.71 ccw(c2541.58,2540) 2541.58,2640 2160,2640 2152.29,2647.71 cw(c2223,2718.42) 2123,2718.42 2123,2792 2123,3546.86 cw(c2157.14,3546.86) 2133,3571 2156.71,3594.71 cw(c2227.42,3524) 2227.42,3624 2789,3624 2905.58,3624 cw(c2905.58,3524) 2976.29,3594.71 3004,3567 3017.71,3553.29 cw(c2947,3482.58) 3047,3482.58 3047,2385 ccw(c3109.77,2385) 3065.38,2340.62 3210,2196 cw(c3139.99,2125.99) 3239,2125.99 3239,2092 3239,1965.42 cw(c3139,1965.42) 3209.71,1894.71 3067,1752 2982.29,1667.29 ccw(c3053,1596.58) 2953,1596.58 2953,1464 2953,1462.42 cw(c2853,1462.42) 2923.71,1391.71 2879,1347 2873.29,1341.29 cw(c2802.58,1412) 2802.58,1312 2728.31,1312 cw(c2728.31,1339.31) 2709,1320 cw(c2742.8,1353.8) 2695,1353.8 2695,1425 2695,1443.34 cw(c2708.66,1443.34) 2699,1453 cw(c2708.66,1443.34) 2708.66,1457 2728,1457
DC- on Bottom Layer "AutoNaming" (solid, remove dead copper, pour order 0): 2325,1204 ccw(c2325,1245.04) 2354.02,1216.02 2385,1247 ccw(c2382.59,1249.41) 2386,1249.41 2386,1323 2374.28,1334.72 cw(c2442.57,1403) 2346,1403 2346,1530.13 cw(c2410.87,1530.13) 2365,1576 cw(c2410.87,1530.13) 2410.87,1595 2517,1595 2569.58,1595 cw(c2569.58,1495) 2640.29,1565.71 2685,1521 ccw(c2726.04,1562.04) 2726.04,1504 2764,1504 2764,1528.25 ccw(c2761.53,1528.25) 2763.28,1530 ccw(c2765.69,1532.41) 2765.69,1529 2813,1529 2813,2111.89 ccw(c2737.89,2111.89) 2791,2165 ccw(c2733.06,2107.06) 2733.06,2189 2228,2189 2205.42,2189 ccw(c2205.42,2089) 2134.71,2159.71 2123,2148 2114.29,2139.29 ccw(c2185,2068.58) 2097.64,2019.91 2097.64,1350.11 ccw(c2180.6,1302.6) 2113,1235 2114.71,1233.29 ccw(c2185.42,1304) 2185.42,1204 2324,1204
GND on Top Layer "AutoNaming" (solid, remove dead copper, pour order 42): 4197,1618 4167.14,1618 ccw(c4167.14,1583.87) 4143,1608 ccw(c4191.28,1559.72) 4123,1559.72 4123,1467 4123,1395 4123,1385.24 ccw(c4133.24,1385.24) 4126,1378 ccw(c4150.14,1402.14) 4150.14,1368 4204,1368 ccw(c4204,1454.91) 4265.46,1393.46 4284,1412 cw(c4329.87,1366.13) 4329.87,1431 4553,1431 4596.51,1431 ccw(c4596.51,1451.49) 4611,1437 4611.71,1437.71 ccw(c4541,1508.42) 4641,1508.42 4641,1552 4641,1552.93 cw(c4658.07,1552.93) 4646,1565 cw(c4684.62,1526.38) 4684.63,1581 4763,1581 5101.58,1581 ccw(c5101.58,1681) 5172.29,1610.29 5372,1810 5458.71,1896.71 ccw(c5388,1967.42) 5488,1967.42 5488,2633 5488,2674.1 ccw(c5464.11,2674.1) 5481,2691 5474.24,2697.76 cw(c5484.49,2708) 5470,2708 5470,2677.97 cw(c5429.04,2677.97) 5458,2649 cw(c5438.69,2668.31) 5438.69,2641 5436,2641 5367.97,2641 ccw(c5367.97,2606.87) 5343.83,2631 ccw(c5336.6,2623.77) 5336.59,2634 5310,2634 5310,2515.21 cw(c5258.8,2515.21) 5295,2479 cw(c5280.52,2493.48) 5280.51,2473 5185,2473 cw(c5185,2494.73) 5169.64,2479.36 5168,2481 cw(c5182.49,2495.49) 5162,2495.49 5162,2734 5162,2891.59 5162,2894.76 ccw(c5151.77,2894.76) 5159,2902 ccw(c5139.69,2882.7) 5139.69,2910 5075,2910 5048.49,2910 ccw(c5048.48,2889.52) 5034,2904 ccw(c5038.82,2899.17) 5032,2899.17 5032,2521 5032,2503.42 cw(c4932.01,2503.42) 5002.71,2432.71 4873,2303 ccw(c4926.11,2249.89) 4851,2249.89 4851,2236 cw(c4845.4,2230.39) 4853.33,2230.39 4853.33,2201.56 cw(c4849.29,2197.53) 4855,2197.52 4855,1948 4855,1763.11 cw(c4779.9,1763.11) 4833,1710 4815.29,1692.29 cw(c4744.58,1762.99) 4744.58,1663 4548,1663 4518.83,1663 cw(c4518.83,1669.83) 4514,1665 4493,1608 4451.8,1552.93 4424.94,1526.06 4364.25,1508.42 4284,1489.21 4249.5,1501.5 4240.94,1544.2 4240.94,1618
5V on Top Layer "AutoNaming" (solid, remove dead copper, pour order 40): 4372,1254 ccw(c4391.31,1254) 4377.66,1240.34 4451,1167 cw(c4487.21,1130.79) 4487.21,1182 4874,1182 ccw(c4874,1203.73) 4889.36,1188.36 5079,1378 5493.71,1792.71 ccw(c5423,1863.42) 5523,1863.42 5523,2575 5523,2609.93 ccw(c5505.93,2609.93) 5518,2622 cw(c5534.9,2605.1) 5534.9,2629 5537,2629 5593.52,2629 ccw(c5593.52,2635.83) 5598.35,2631 cw(c5603.18,2626.17) 5603.18,2633 5631,2633 5681.93,2633 ccw(c5681.93,2650.07) 5694,2638 cw(c5715.73,2616.27) 5715.73,2647 5738,2647 cw(c5696.96,2647) 5725.98,2617.98 5714,2606 5709.29,2601.29 ccw(c5780,2530.58) 5680,2530.58 5680,1675 5680,1628.21 ccw(c5731.21,1628.21) 5695,1592 5697.27,1589.73 ccw(c5728,1620.46) 5728,1577 5728,1575.24 ccw(c5738.24,1575.24) 5731,1568 ccw(c5740.66,1558.34) 5727,1558.34 5727,1529 5426.42,1529 ccw(c5426.42,1429) 5355.71,1499.71 5091,1235 4973.29,1117.29 cw(c4902.58,1188) 4902.58,1088 4704,1088 4426.36,1088 cw(c4426.36,1173.36) 4366,1113 cw(c4423.94,1170.94) 4342,1170.94 4342,1227 cw(c4349.24,1227) 4344.12,1232.12 4350,1238
GND on Top Layer "AutoNaming" (solid, remove dead copper, pour order 38): 3860,2303 3840.7,2303 cw(c3840.7,2374.7) 3790,2324 3694.29,2419.71 cw(c3765,2490.42) 3665,2490.42 3665,2627 3665,2663.13 cw(c3729.87,2663.13) 3684,2709 3693.71,2718.71 cw(c3764.42,2648) 3764.42,2748 3889,2748 3910.58,2748 ccw(c3910.58,2848) 3981.29,2777.29 4007,2803 ccw(c3975.62,2834.38) 4020,2834.38 4020,2972 ccw(c3952.4,2972) 4000.2,3019.8 3961,3059 3960.29,3059.71 ccw(c3889.58,2989) 3889.58,3089 3838,3089 cw(c3838,3130.04) 3808.98,3101.02 3790,3120 cw(c3811.73,3141.73) 3781,3141.73 3781,3174 3781,3407.58 cw(c3881,3407.58) 3810.29,3478.29 3848,3516 ccw(c3868.87,3495.13) 3839.36,3495.13 3839.36,3492.36 cw(c3803.14,3492.36) 3828.75,3466.75 3821,3459 3882.64,3520.64 cw(c3898,3505.27) 3898,3527 3898,3321.49 ccw(c3918.49,3321.49) 3904,3307 ccw(c3940.21,3343.21) 3940.21,3292 4020,3292 4032.86,3292 ccw(c4032.86,3326.14) 4057,3302 ccw(c4042.51,3316.49) 4063,3316.49 4063,3352 ccw(c4063,3356.83) 4066.41,3353.41 4074,3361 4085.29,3349.71 ccw(c4095,3359.41) 4095,3345.69 4125.89,3345.69 cw(c4125.89,3281.89) 4171,3327 4167.11,3327 ccw(c4167.11,3251.89) 4114,3305 ccw(c4164.7,3254.3) 4093,3254.3 4093,3201 4093,2739.83 cw(c4086.17,2739.83) 4091,2735 4087.66,2731.66 cw(c4074,2745.31) 4074,2726 ccw(c4074,2639.09) 4012.54,2700.54 4012,2700 3908.29,2596.29 ccw(c3979,2525.58) 3879,2525.58 3879,2324 cw(c3874.17,2324) 3877.59,2320.59 3873,2316
5V on Top Layer "AutoNaming" (solid, remove dead copper, pour order 36): 3178,1774 3181.72,1774 cw(c3181.72,1705.72) 3230,1754 cw(c3184.13,1708.13) 3249,1708.13 3249,1647 ccw(c3323.84,1647) 3270.92,1594.08 3325,1540 3544.71,1320.29 ccw(c3615.42,1391) 3615.42,1291 3619,1291 3683.79,1291 ccw(c3683.79,1342.21) 3720,1306 cw(c3722.41,1308.41) 3719,1308.41 3719,1335 3719,1394.27 ccw(c3710.28,1394.27) 3716.45,1400.43 3730.28,1414.27 ccw(c3728.55,1416) 3731,1416 ccw(c3673.06,1416) 3714.03,1456.97 3713,1458 3713,1536 ccw(c3713,1560.14) 3730.07,1543.07 3734,1547 3752.79,1565.79 ccw(c3701.57,1617) 3774,1617 cw(c3822.28,1617) 3788.14,1651.14 3820,1683 3834.22,1697.22 ccw(c3815.44,1716) 3842,1716 3842,1365.42 cw(c3742,1365.42) 3812.71,1294.71 ccw(c3828.91,1278.51) 3806,1278.51 3806,1268 3806,1168.73 cw(c3775.27,1168.73) 3797,1147 cw(c3755.96,1188.04) 3755.96,1130 3702,1130 3697.42,1130 cw(c3697.42,1230) 3626.71,1159.29 3596,1190 3147.29,1638.71 cw(c3218,1709.42) 3118,1709.42 3118,1725 ccw(c3118,1727.41) 3119.71,1725.71 3132,1738
GND on Top Layer "AutoNaming" (solid, remove dead copper, pour order 34): 3563,1407 3629.51,1407 cw(c3629.51,1386.51) 3644,1401 cw(c3648.83,1396.17) 3648.83,1403 3681,1403 3681,1436.27 cw(c3711.73,1436.27) 3690,1458 3682.97,1465.03 cw(c3723.94,1506) 3666,1506 3666,1602.03 cw(c3706.97,1602.03) 3678,1631 3678.98,1631.98 cw(c3708,1602.96) 3708,1644 ccw(c3708,1665.73) 3723.36,1650.36 3745,1672 ccw(c3689.47,1727.53) 3768,1727.53 3768,1802.78 3778.9,1802.78 ccw(c3778.9,1841.1) 3806,1814 cw(c3842.21,1777.79) 3842.21,1829 3848,1829 cw(c3848,1812.1) 3859.95,1824.05 3868,1816 cw(c3829.37,1777.37) 3884,1777.37 3884,1286 3884,1822.34 ccw(c3870.34,1822.34) 3880,1832 3880.51,1831.49 ccw(c3901,1851.97) 3901,1823 3901,2080.58 ccw(c3801,2080.58) 3871.71,2151.29 3836,2187 3544.29,2478.71 ccw(c3473.58,2408) 3473.58,2508 3207,2508 3196.07,2508 ccw(c3196.07,2490.93) 3184,2503 3171.95,2490.95 ccw(c3183.9,2479) 3167,2479 3167,2468.14 ccw(c3201.14,2468.14) 3177,2444 3190.58,2444 cw(c3190.58,2344) 3261.29,2414.71 3276,2400 3282.71,2393.29 cw(c3212,2322.58) 3312,2322.58 3312,1858 ccw(c3336.14,1858) 3319.07,1840.93 3352,1808 ccw(c3364.07,1820.07) 3364.07,1803 3432,1803 3463.54,1803 ccw(c3463.54,1864.46) 3507,1821 3516.05,1830.05 ccw(c3504.1,1842) 3521,1842 3621,1842 3707.51,1842 cw(c3707.51,1821.51) 3722,1836 3723.81,1834.19 cw(c3701.62,1812) 3733,1812 3745.73,1812 cw(c3745.73,1780.51) 3768,1802.78 3768,1774 3768,1741 ccw(c3775.24,1733.76) 3765,1733.76 3765,1697 ccw(c3765,1687.34) 3758.17,1694.17 3743,1679 cw(c3728.51,1693.49) 3728.51,1673 3688,1673 3524.38,1673 ccw(c3524.38,1628.62) 3493,1660 ccw(c3521.97,1631.03) 3481,1631.03 3481,1587 3492.41,1587 ccw(c3492.41,1599.15) 3501,1590.56 3512.47,1579.09 ccw(c3532,1598.62) 3532,1571 cw(c3498.2,1537.2) 3546,1537.2 3546,1436 ccw(c3558.07,1436) 3549.54,1427.46 3554,1423
GND on Top Layer "AutoNaming" (solid, remove dead copper, pour order 32): 2674,1974 2872.99,1974 cw(c2872.99,1874.99) 2943,1945 2969.71,1918.29 cw(c2899,1847.58) 2999,1847.58 2999,1635 ccw(c3040.04,1635) 3011.02,1605.98 3021,1596 ccw(c3028.24,1603.24) 3028.24,1593 3072,1593 3083.03,1581.97 cw(c3042.06,1541) 3100,1541 3100,1515.9 cw(c3076.1,1515.9) 3093,1499 cw(c3054.37,1537.63) 3054.37,1483 2987,1483 2938.04,1483 cw(c2938.04,1541.04) 2897,1500 cw(c2923.56,1526.56) 2886,1526.56 2886,1694 2886,1792.82 ccw(c2834.86,1792.82) 2871.02,1828.98 2864,1836 ccw(c2818.13,1790.13) 2818.13,1855 2694,1855 2656.97,1855 cw(c2656.97,1895.97) 2628,1867 cw(c2683.53,1922.53) 2605,1922.53 2605,1928 cw(c2662.94,1928) 2621.97,1968.97 2622,1969 cw(c2643.73,1947.27) 2643.73,1978 2671,1978
5V on Top Layer "AutoNaming" (solid, remove dead copper, pour order 30): 3291,2735 3254.07,2735 cw(c3254.07,2752.07) 3242,2740 ccw(c3229.93,2727.93) 3229.93,2745 3177,2745 cw(c3177,2747.41) 3175.29,2745.71 3137,2784 3137,3283.58 cw(c3237,3283.58) 3166.29,3354.29 3417,3605 4082.71,4270.71 cw(c4153.42,4200) 4153.42,4300 5504,4300 5569.58,4300 cw(c5569.58,4200) 5640.29,4270.71 5855,4056 5873.71,4037.29 cw(c5803,3966.58) 5903,3966.58 5903,3353 cw(c5842.64,3353) 5885.32,3310.32 5687,3112 ccw(c5679.3,3104.3) 5679.3,3115.19 5541.24,3115.19 cw(c5548.59,3115.19) 5543.39,3120.39 5553,3130 5572.49,3130 ccw(c5572.49,3154.25) 5589.63,3137.1 ccw(c5589.63,3178.78) 5619.11,3149.31 5668.65,3198.85 5718.46,3248.66 cw(c5741,3226.12) 5741,3258 cw(c5762.73,3258) 5747.36,3273.36 5780,3306 ccw(c5751.03,3334.97) 5792,3334.97 5792,3436 5792,3978.58 ccw(c5692,3978.58) 5762.71,4049.29 5759,4053 5642.29,4169.71 ccw(c5571.58,4099) 5571.58,4199 4955,4199 4258.42,4199 ccw(c4258.42,4099) 4187.71,4169.71 4069,4051 3624.29,3606.29 ccw(c3695,3535.58) 3595,3535.58 3595,3516 cw(c3575.69,3516) 3589.34,3502.34 3356.29,3269.29 ccw(c3427,3198.58) 3327,3198.58 3327,2863 3327,2754.31 cw(c3299.69,2754.31) 3319,2735 ccw(c3297.27,2713.27) 3297.27,2744 3277,2744 3268.12,2735.12 ccw(c3246.68,2713.68) 3246.68,2744 3177,2744 3177,2766.17 ccw(c3170.17,2766.17) 3175,2771
DC- on Top Layer "AutoNaming" (solid, remove dead copper, pour order 28): 2232,2077 2276.54,2077 ccw(c2276.54,2138.46) 2320,2095 ccw(c2254.82,2160.18) 2347,2160.18 2347,2513 2347,2557.82 cw(c2439.18,2557.82) 2374,2623 cw(c2381.24,2630.24) 2371,2630.24 2371,2693 2371,3073.82 cw(c2463.18,3073.82) 2398,3139 cw(c2455.94,3196.94) 2374,3196.94 2374,3197 2374,3215.2 ccw(c2326.2,3215.2) 2360,3249 2340.24,3268.76 ccw(c2330,3258.51) 2330,3273 ccw(c2301.03,3273) 2321.51,3293.49 2303,3312 2296.46,3312 ccw(c2296.46,3250.54) 2253,3294 ccw(c2265.07,3281.93) 2248,3281.93 2248,3208 ccw(c2330.08,3208) 2272.04,3149.96 2296,3126 cw(c2233.23,3063.23) 2322,3063.23 2322,2841 2322,2741.42 cw(c2222,2741.42) 2292.71,2670.71 2195,2573 2134.29,2512.29 ccw(c2205,2441.58) 2105,2441.58 2105,2234 2105,2156.42 ccw(c2205,2156.42) 2134.29,2085.71 2139,2081 ccw(c2153.49,2095.49) 2153.49,2075 2229,2075

## Keep-outs
Keep-Out Layer:
  lines w10: 2079,1016 ccw(c2199.71,1016) 2114.36,930.64 2153.98,891.02 ccw(c2183,920.04) 2183,879 2309,879 5932,879 ccw(c5932,891.07) 5940.54,882.54 ccw(c5940.54,930.82) 5974.68,896.68 ccw(c5937.69,933.67) 5990,933.67 5990,4335.06 ccw(c5908.06,4335.06) 5966,4393 cw(c5966,4414.73) 5950.64,4399.36 5949,4401 2164,4401 ccw(c2164,4328.57) 2112.79,4379.79 ccw(c2194.36,4298.22) 2079,4298.22 2079,1016

## Other copper
Top Layer:
  text "智能消防联动系统 / 青岛理工大学 / 岳英豪  刘宇阳 / 2017.05.04" at 2407,3743 h140

## Silkscreen, mask and mechanical layers (free items; w line width, h text height)
Top Overlay:
  text "3.3V" at 5826,3962 h20 r90
  text "5V A2 A3 GND" at 3606,3428 h20
  text "5V B15 B14 B13 B12" at 5848,3314 h20 r90
  text "5V C9 C8 C7 C6" at 5840,2780 h20 r90
  text "GND RX TX 5V" at 3398,2483 h20 r90
  text "24V" at 2177,1743 h20
  text "GND SWCLK SWDIO 5V" at 5860,1219 h20 r90
  text "FAN 12V GND" at 4597,1124 h20
  text "GND  A10 A9 A8 A7 5V" at 3925,1122 h20
Bottom Overlay:
  text "3.3V" at 3894,1319 h20
Top Solder:
  text "智能消防联动系统 / 青岛理工大学 / 岳英豪  刘宇阳 / 2017.05.04" at 2407,3743 h140

## Text inside footprints (layer, text, board x,y; h text height)
DPLC-L: Top Overlay "5V" at 2991,2754 h60